# Altium PCB minibot_v1.PcbDoc (part 2 of 2)
Units mm, origin at the board's own origin, x right, y up, seen from the top; angles counter-clockwise.
Board outline 80 x 98 mm, 6 copper layers (Top Layer, GND, PWR, SIG2, GND2, Bottom Layer), stack 1.583 mm thick; 97 components, 104 nets, 461 pads, 159 vias.
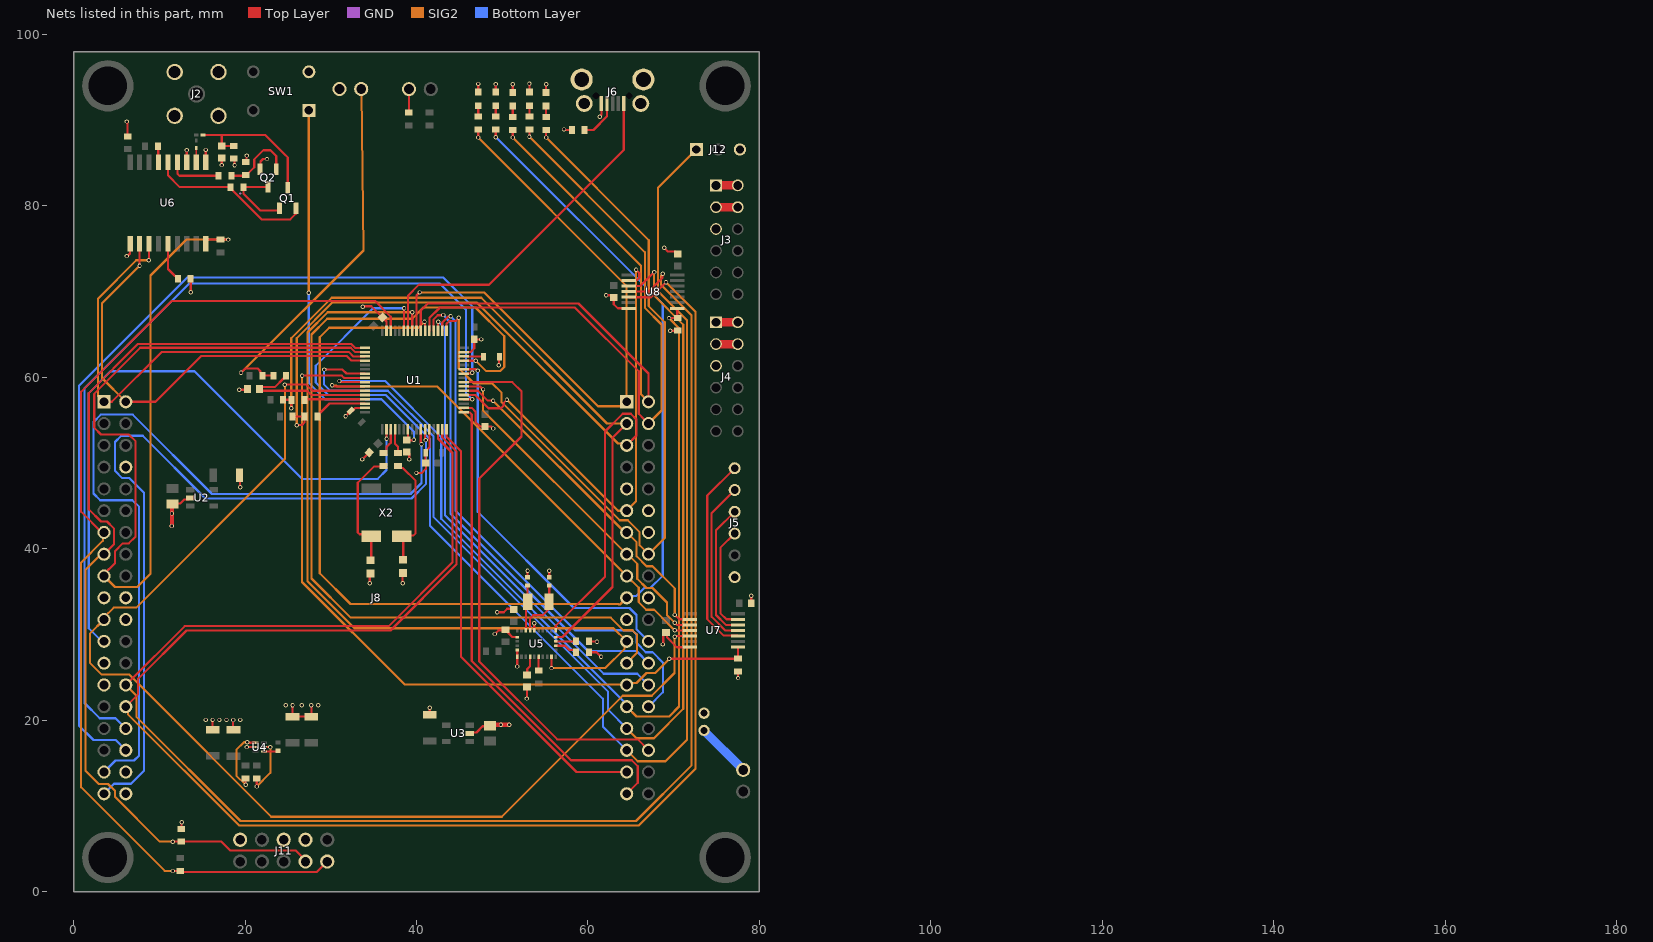
[diagram p6: the nets of this part, all layers, seen from the top]

## Via types
v1: diameter 0.5, hole 0.3, Top Layer to Bottom Layer, 159 vias

## Nets (pads, with @x,y where several pads share a name; then routed paths per layer and width w, separated by ;. In a path a pad name is that pad's centre, name@x,y a point inside that pad or via, vN(x,y) a via of type N, cw(c..) or ccw(c..) an arc to the next point about the centre after c; other vN are vias at no path point) (continued)
GND: C1.1 C2.1 C3.1 C4.1 C5.1 C6.1 C7.2 C8.2 C9.1 C10.1 C11.1 C13.1 C14.1 C15.1 C16.1 C17.1 C18.1 C19.1 C20.1 C21.1 C22.1 C23.1 C24.1 C25.1 C26.1 C27.1 C28.1 C29.1 C30.2 C31.2 D1.1 D2.1 D3.1 D4.1 D5.1 J1.2 J2.2 J2.3 J2.4 J2.5 J3.05 J4.05 J5.1 J6.5 J6.MH1 J6.MH2 J6.MH3 J6.MH4 J7.2 J8.CN7_8 J8.CN7_19 J8.CN7_20 J8.CN7_22 J8.CN10_9 J8.CN10_20 J10.2 J11.2 J11.6 J11.8 J12.A3 Q2.2 R7.1 R9.1 R10.1 R12.1 R13.1 R15.1 R23.1 R27.1 R34.2 R37.1 R38.1 SW1.3 U1.12 U1.18 U1.31 U1.47 U1.63 U2.2 U3.2 U4.2 U5.2 U5.5 U5.6 U5.25 U6.1 U6.10 U6.12 U7.7 U8.7 | length 94.3
  Top Layer w0.254: v1(6.202,74.148) 6.249,74.195 6.345,74.195 6.593,74.443 6.593,75.584 U6.1@6.613,75.604 ; v1(6.213,89.828) 6.213,89.761 6.313,89.661 R27.1@6.313,88.108 ; C1.1@11.475,45.176 C1.1@11.525,45.226 11.588,45.289 12.455,45.289 12.935,45.769 13.435,45.769 U2.2@13.601,45.935 ; R38.1@12.548,7.354 12.611,7.417 v1(12.611,8.115) ; U6.12@13.213,85.104 v1(13.213,86.505) ; v1(13.663,69.925) R23.1@13.663,71.501 ; U6.10@15.413,85.104 v1(15.413,86.528) ; v1(16.217,20.048) 16.225,20.04 C18.1@16.225,18.908 ; v1(17.284,84.761) 17.284,85.525 C13.1@17.334,85.575 ; v1(18.614,20.038) 18.614,18.921 C5.1@18.65,18.885 ; R10.1@18.675,85.483 18.784,85.374 v1(18.784,84.743) ; v1(19.325,58.55) 20.21,58.55 C28.1@20.289,58.629 ; C2.1@19.362,48.578 19.431,48.509 v1(19.431,47.185) ; R9.1@20.086,85.111 20.186,85.211 v1(20.186,85.863) ; v1(20.195,16.88) U4.2@21.211,16.88 ; Q2.2@21.743,84.277 21.801,84.336 21.801,85.17 22.093,85.461 v1(22.561,85.461) ; C6.1@25.55,20.453 C19.1@27.35,20.453 ; C6.1@25.55,20.578 v1(25.55,21.757) ; C19.1@27.738,20.436 v1(27.738,21.757) ; v1(31.73,55.471) 31.73,55.487 32.312,56.069 C22.1@32.312,56.086 32.528,56.086 32.882,56.44 U1.63@33.404,56.44 ; v1(33.675,50.425) C26.1@34.488,51.238 ; v1(33.725,68.25) 33.772,68.297 34.72,68.297 C23.1@36.017,67.001 36.501,66.517 36.501,66.037 ; v1(34.55,35.975) 34.55,37.037 C30.2@34.644,37.131 ; v1(38.381,35.975) 38.381,37.111 C31.2@38.45,37.18 ; C29.1@39.001,51.275 39.153,51.122 v1(39.153,50.425) ; 39.125,91.225 J10.2@39.125,93.613 ; v1(39.987,48.85) 40.618,48.85 41.093,49.325 C21.1@41.093,50.025 ; C21.1@41.053,50.025 41.053,51.294 41.099,51.34 41.099,51.406 41.501,51.808 U1.12@41.501,53.94 ; v1(41.55,21.482) 41.55,20.663 C4.1@41.561,20.652 ; U1.18@45.501,56.44 U1.18@45.534,56.407 ; 46.098,56.44 46.443,56.44 46.863,56.02 46.863,54.826 47.421,54.268 48.005,54.268 C25.1@48.006,54.267 48.698,54.267 48.932,54.033 v1(48.96,54.033) ; 46.098,62.94 46.289,62.94 46.736,63.387 C24.1@46.736,64.427 v1(47.55,64.427) ; U3.2@46.216,18.474 46.327,18.585 46.988,18.585 47.706,19.303 48.473,19.303 C3.1@48.646,19.475 ; D1.1@47.2,93.275 v1(47.2,94.222) ; v1(49.141,30.071) 49.161,30.071 49.597,30.507 49.924,30.507 ; D2.1@49.25,93.275 v1(49.25,94.203) ; v1(49.4,32.6) 50.167,32.6 50.569,33.003 C10.1@51.512,33.003 ; v1(49.579,61.41) 49.626,61.457 49.626,62.407 C27.1@49.579,62.454 ; C9.1@50.552,30.352 50.554,30.354 51.202,29.706 U5.2@51.761,29.706 ; D3.1@51.225,93.203 D3.1@51.225,93.228 v1(51.225,94.188) ; v1(51.746,26.277) U5.6@51.746,27.419 U5.5@51.746,28.206 ; v1(52.86,22.537) 52.899,22.575 C11.1@52.899,23.892 ; C7.2@52.95,36.681 v1(52.95,37.45) ; D4.1@53.17,93.278 v1(53.17,94.263) ; v1(53.725,31.325) 53.736,31.314 53.736,30.503 U5.25@53.746,30.493 ; D5.1@55.116,93.203 D5.1@55.116,93.228 v1(55.116,94.188) ; C8.2@55.475,36.678 v1(55.475,37.45) ; v1(57.204,88.912) 57.257,88.859 R37.1@58.12,88.859 ; R7.1@60.09,29.21 60.125,29.175 v1(61.05,29.175) ; R13.1@60.102,27.94 60.985,27.94 v1(61.525,27.4) ; v1(61.365,90.38) 61.365,90.447 61.565,90.647 61.565,91.19 J6.5@61.575,91.2 ; v1(62.112,69.575) 62.743,69.575 C16.1@63.014,69.304 63.014,68.526 63.486,68.054 U8.7@64.767,68.054 ; v1(68.733,28.854) 68.772,28.893 68.772,30.09 68.935,30.252 69.208,29.979 69.208,29.689 70.367,28.53 U7.7@71.857,28.53 ; v1(68.9,75.1) 69.34,74.66 70.183,74.66 C15.1@70.456,74.387 ; v1(69.592,65.444) R15.1@70.456,65.444 ; R12.1@77.495,25.7 77.5,25.695 v1(77.5,24.925) ; C17.1@79.034,33.655 v1(79.034,34.525)
  Top Layer w0.5: v1(11.47,42.661) 11.475,42.666 v1(11.475,44.125) C1.1@11.475,45.176 ; C3.1@48.646,19.475 v1(49.847,19.475) v1(50.825,19.475)
  GND w0.254: 19.44,81.449 19.456,81.432
  other v1: 15.417,20.046 17.017,20.046 17.842,20.046 19.45,20.046 24.742,21.765 26.604,21.772 28.531,21.772
I2C1_SCL_IMU: J8.CN10_3 R17.1 R18.2 U5.19 | length 86
  Top Layer w0.254: R17.1@24.45,57.397 25.496,57.397 25.421,57.322 25.421,56.422 v1(25.394,56.395) ; 56.447,29.718 57.023,29.718 62.865,35.56 62.865,52.959 J8.CN10_3@64.516,54.61
  SIG2 w0.254: v1(25.394,56.395) 25.394,64.562 30.107,69.275 47.55,69.275 62.215,54.61 J8.CN10_3@64.516,54.61
I2C1_SDA_IMU: J8.CN10_5 R16.1 R19.2 U5.20 | length 94.3
  Top Layer w0.254: R16.1@25.553,55.441 R19.2@26.953,55.441 26.953,54.758 26.642,54.447 26.072,54.447 v1(26.025,54.4) ; U5.20@56.246,30.493 56.246,31.021 61.976,36.751 61.976,53.691 64.041,55.756 64.991,55.756 65.662,55.085 65.662,53.216 J8.CN10_5@64.516,52.07
  SIG2 w0.254: v1(26.025,54.4) 26.025,64.575 30.186,68.736 47.039,68.736 63.5,52.275 64.311,52.275 J8.CN10_5@64.516,52.07
ID: J6.4 R37.2 | length 4.7
  Top Layer w0.254: R37.2@59.62,88.859 60.632,88.859 62.215,90.442 J6.4@62.215,91.938
INT_IMU: J8.CN10_23 U1.41 U5.14 | length 96.2
  Top Layer w0.254: U1.41@39.501,65.44 v1(39.501,67.593) ; v1(55.746,26.092) U5.14@55.746,27.419
  SIG2 w0.254: v1(39.501,67.593) 29.643,67.593 27.287,65.237 27.287,36.213 32.76,30.74 62.986,30.74 J8.CN10_23@64.516,29.21 64.272,28.966 64.272,28.348 62.016,26.092 v1(55.746,26.092)
LED_1: J8.CN10_1 R28.1 U1.40 | length 73.4
  Top Layer w0.254: U1.40@40.001,65.44 40.001,69.55 v1(40.357,69.906) ; R28.1@47.125,88.878 47.2,88.803 v1(47.2,87.975)
  SIG2 w0.254: v1(40.357,69.906) 47.887,69.906 61.16,56.633 63.999,56.633 J8.CN10_1@64.516,57.15 64.475,57.191 64.475,70.7 v1(47.2,87.975)
LED_2: J8.CN10_19 R29.1 U1.38 | length 144.6
  Top Layer w0.254: v1(40.929,66.5) 40.976,66.453 40.976,65.465 U1.38@41.001,65.44 ; v1(49.25,88) R29.1@49.25,88.931
  SIG2 w0.254: v1(40.929,66.5) 40.208,65.78 29.828,65.78 28.725,64.676 28.725,37.15 32.306,33.569 63.437,33.569 63.509,33.569 63.583,33.515 63.741,33.515 J8.CN10_19@64.516,34.29
  Bottom Layer w0.254: v1@49.266,88.016 68.71,68.572 68.71,36.863 67.291,35.445 66.59,35.445 65.662,34.517 64.743,34.517 J8.CN10_19@64.516,34.29
LED_3: J8.CN10_2 R30.1 U1.39 | length 74.2
  Top Layer w0.254: U1.39@40.501,65.44 40.501,67.802 41.317,68.618 58.89,68.618 67.056,60.452 J8.CN10_2@67.056,57.15 ; v1(51.225,87.975) R30.1@51.225,88.859
  SIG2 w0.254: v1(51.225,87.975) 66.179,73.021 66.179,58.027 J8.CN10_2@67.056,57.15
LED_4: J8.CN10_4 R31.1 U1.37 | length 76.6
  Top Layer w0.254: U1.37@41.501,65.44 41.501,66.919 42.732,68.15 58.472,68.15 65.91,60.712 65.91,55.756 J8.CN10_4@66.515,55.151 ; v1(53.17,88.052) R31.1@53.17,88.934
  SIG2 w0.254: v1(53.17,88.052) 66.633,74.588 66.633,68.115 68.577,66.171 68.577,56.131 J8.CN10_4@67.056,54.61
LED_5: J8.CN10_16 R32.1 U1.33 | length 97.1
  Top Layer w0.254: U1.33@43.501,65.44 43.501,66.252 43.81,66.561 44.55,66.561 v1(44.934,66.946) ; v1(55.116,87.975) R32.1@55.116,88.859
  SIG2 w0.254: v1(44.934,66.946) 44.934,61.056 46.702,59.288 48.841,59.288 49.925,58.204 49.925,57.1 63.7,43.325 64.63,43.325 66.025,41.93 66.025,40.401 J8.CN10_16@67.056,39.37 68.961,41.275 68.961,66.429 67.087,68.303 67.087,76.004 v1(55.116,87.975)
MOT_1A_3V3: J8.CN10_13 U1.22 U7.2 | length 39.6
  Top Layer w0.254: 46.098,58.44 47.152,58.44 48.305,57.288 v1(48.932,57.288) ; v1(70.116,32.291) 70.627,31.78 U7.2@71.857,31.78
  SIG2 w0.254: v1(48.932,57.288) 64.31,41.91 J8.CN10_13@64.516,41.91 65.67,40.756 65.67,39.135 66.829,37.976 67.531,37.976 70.116,35.391 v1(70.116,32.291)
MOT_1B_3V3: J8.CN10_15 U1.23 U7.3 | length 40.6
  Top Layer w0.254: 46.098,58.94 47.401,58.94 47.748,58.592 v1(47.766,58.592) ; v1(70.116,31.374) 70.122,31.374 70.366,31.13 U7.3@71.857,31.13
  SIG2 w0.254: v1(47.766,58.592) 47.766,56.12 J8.CN10_15@64.516,39.37 64.63,39.37 65.75,38.25 65.75,36.515 66.829,35.436 67.531,35.436 69.222,33.744 69.222,32.253 70.102,31.374 v1(70.116,31.374)
MOT_2A_3V3: J8.CN10_17 U1.58 U7.4 | length 58.4
  Top Layer w0.254: v1(30.15,59.071) 30.217,59.071 30.348,58.94 U1.58@34.001,58.94 ; v1(70.107,30.505) 70.12,30.492 71.844,30.492 U7.4@71.857,30.48
  SIG2 w0.254: v1(30.15,59.071) 30.197,59.024 30.668,59.024 30.752,58.94 42.406,58.94 J8.CN10_17@64.516,36.83 ; J8.CN10_17@64.532,36.83 65.91,35.452 65.914,35.352 65.914,35.332 65.91,35.255 65.91,33.782 66.796,32.896 67.716,32.896 69.485,31.127 69.485,31.113 70.093,30.505 v1(70.107,30.505)
MOT_2B_3V3: J8.CN7_21 U1.59 U7.5 | length 141.6
  Top Layer w0.254: v1(24.65,59.15) 27.151,59.15 27.861,58.44 U1.59@34.001,58.44 ; v1(70.107,29.751) 70.174,29.751 70.253,29.83 U7.5@71.857,29.83
  SIG2 w0.254: v1(24.65,59.15) 24.65,50.471 7.323,33.144 5.621,33.144 5.618,33.147 4.699,33.147 3.556,32.004 J8.CN7_21@3.556,31.75 1.905,30.099 1.905,26.7 3.279,25.326 6.52,25.326 9.094,22.753 9.094,22.739 23.07,8.763 49.943,8.763 64.04,22.86 67.437,22.86 70.093,25.516 70.093,29.737 v1(70.107,29.751)
MOTOR_1_N: J3.03 J3.04 | length 2.5
  Top Layer w1: J3.03@74.78,79.846 J3.04@77.32,79.846
MOTOR_1_P: J3.01 J3.02 | length 2.5
  Top Layer w1: J3.01@74.78,82.386 J3.02@77.32,82.386
MOTOR_2_N: J4.03 J4.04 | length 2.5
  Top Layer w1: J4.03@74.93,63.881 J4.04@77.47,63.881
MOTOR_2_P: J4.01 J4.02 | length 2.5
  Top Layer w1: J4.01@74.93,66.421 J4.02@77.47,66.421
MOTOR_IN1: J5.3 U7.13 | length 11.5
  Top Layer w0.254: U7.13@76.657,31.78 76.149,31.78 75.438,32.491 75.438,40.119 J5.3@77.102,41.783
MOTOR_IN2: J5.4 U7.12 | length 16
  Top Layer w0.254: J5.4@77.102,44.323 74.93,42.151 74.93,32.28 76.08,31.13 U7.12@77.495,31.13
MOTOR_IN3: J5.5 U7.11 | length 19.6
  Top Layer w0.254: J5.5@77.102,46.863 74.422,44.183 74.422,32.07 76.012,30.48 U7.11@77.495,30.48
MOTOR_IN4: J5.6 U7.10 | length 23.3
  Top Layer w0.254: J5.6@77.102,49.403 73.914,46.215 73.914,31.801 75.834,29.881 77.445,29.881 U7.10@77.495,29.83
NetC7_1: C7.1 U5.27 Y1.2 | length 4.4
  Top Layer w0.254: U5.27@52.754,30.493 Y1.2@52.754,32.96 ; Y1.2@52.95,33.825 C7.1@52.95,35.727
NetC8_1: C8.1 U5.26 Y1.1 | length 6.6
  Top Layer w0.254: U5.26@53.246,30.493 53.246,31.877 53.618,32.249 54.718,32.249 55.649,33.18 Y1.1@55.649,33.58 ; Y1.1@55.45,33.825 55.475,33.85 C8.1@55.475,35.725
NetC11_2: C11.2 U5.9 | length 2.8
  Top Layer w0.254: C11.2@52.899,25.292 52.899,25.046 52.917,25.064 52.917,25.982 53.246,26.312 U5.9@53.246,27.419
NetC12_2: C12.2 U6.11 | length 1.5
  Top Layer w0.147: U6.11@14.313,85.302 C12.2@14.313,86.739 C12.2@14.313,86.803
NetC13_2: C13.2 L2.2 Q1.3 R10.2 | length 17
  Top Layer w0.254: L2.2@15.3,88.25 17.284,88.25 ; R10.2@18.675,87 17.309,87 C13.2@17.284,86.975 17.284,88.25 ; Q1.3@24.981,82.107 24.981,85.658 24.702,85.938 22.389,88.25 17.284,88.25
NetC27_2: C27.2 U1.30 | length 2.1
  Top Layer w0.254: U1.30@45.501,62.44 45.509,62.432 C27.2@47.55,62.432
NetC28_2: C28.2 R20.2 U1.60 | length 15.8
  Top Layer w0.254: R20.2@24.803,60.198 24.803,60.098 24.58,59.875 24.48,59.875 23.466,58.862 21.922,58.862 C28.2@21.689,58.629 21.879,58.44 27.219,58.44 27.727,57.932 U1.60@33.404,57.932
NetC30_1: C30.1 R26.2 X2.4 | length 14.2
  Top Layer w0.254: C30.1@34.726,38.939 X2.4@34.726,41.446 34.478,41.694 33.363,41.694 33.147,41.91 33.147,47.709 35.028,49.59 R26.2@36.501,49.59
NetC31_1: C31.1 R25.2 X2.1 | length 13.6
  Top Layer w0.254: R25.2@37.653,49.59 37.791,49.452 38.26,49.452 38.283,49.428 38.414,49.428 39.9,47.943 39.9,41.805 39.639,41.544 38.374,41.544 X2.1@38.276,41.446 38.45,41.272 C31.1@38.45,38.72
NetD1_2: D1.2 R28.2 | length 1.2
  Top Layer w0.254: D1.2@47.2,91.675 R28.2@47.202,90.431 R28.2@47.202,90.431
NetD2_2: D2.2 R29.2 | length 1.2
  Top Layer w0.254: R29.2@49.25,90.431 D2.2@49.25,91.675
NetD3_2: D3.2 R30.2 | length 1.2
  Top Layer w0.254: R30.2@51.225,90.359 D3.2@51.225,91.603
NetD4_2: D4.2 R31.2 | length 1.2
  Top Layer w0.254: R31.2@53.17,90.434 D4.2@53.17,91.678
NetD5_2: D5.2 R32.2 | length 1.2
  Top Layer w0.254: R32.2@55.116,90.359 D5.2@55.116,91.603
NetJ1_1: J1.1 J9.2 | length 6.6
  Top Layer w0.254: J9.2@77.978,14.351 J9.2@78.105,14.224
  Bottom Layer w1: J1.1@73.533,18.796 J9.2@78.105,14.224
NetJ7_1: J7.1 R20.1 R21.1 | length 43.2
  Top Layer w0.254: v1(19.534,60.521) 19.534,60.532 20.032,61.029 21.047,61.029 21.05,61.027 21.476,61.027 21.816,60.686 21.816,60.521 21.944,60.393 R21.1@22.109,60.393 ; R21.1@22.028,60.198 R20.1@23.303,60.198
  SIG2 w0.254: v1(19.534,60.521) 33.809,74.795 33.809,74.876 J7.1@33.575,93.35
NetL1_1: L1.1 U4.4 | length 1.7
  Top Layer w0.254: U4.4@22.202,16.38 L1.1@23.9,16.38
NetQ1_1: Q1.1 Q2.3 R11.1 | length 8.7
  Top Layer w0.254: Q2.3@22.695,82.245 22.633,82.183 R11.1@19.831,82.183 19.831,81.395 21.761,79.465 Q1.1@24.029,79.465
NetQ1_2: Q1.2 R11.2 U6.14 | length 18.8
  Top Layer w0.254: U6.14@11.013,85.104 11.013,83.559 12.389,82.183 R11.2@18.274,82.183 ; R11.2@18.274,82.083 21.933,78.424 25.273,78.424 Q1.2@25.934,79.084
NetQ2_1: Q2.1 R8.1 R9.2 | length 8.5
  Top Layer w0.254: R8.1@18.384,83.522 R9.2@19.805,83.522 ; R9.2@20.086,83.611 20.186,83.611 21.082,84.507 21.082,85.419 22.14,86.477 22.982,86.477 23.648,85.812 Q2.1@23.648,84.277
NetR4_1: R4.1 U5.11 | length 1.6
  Top Layer w0.254: R4.1@54.246,25.814 U5.11@54.246,27.419
NetR7_2: R7.2 U5.18 | length 2.4
  Top Layer w0.254: U5.18@56.232,29.21 R7.2@58.59,29.21
NetR8_2: R8.2 U6.13 | length 6.4
  Top Layer w0.254: 12.113,83.748 U6.13@12.113,85.104 ; 12.12,83.748 12.346,83.522 R8.2@17.08,83.522
NetR18_1: R18.1 U1.61 | length 7
  Top Layer w0.254: R18.1@27.022,57.371 27.09,57.44 U1.61@34.001,57.44
NetR19_1: R19.1 U1.62 | length 6.2
  Top Layer w0.254: R19.1@28.453,55.441 28.453,55.541 29.86,56.948 33.531,56.948 33.539,56.94 U1.62@34.001,56.94
NetR23_2: R23.2 U6.5 | length 4.6
  Top Layer w0.254: U6.5@11.013,75.604 11.013,72.64 11.829,71.824 11.94,71.824 12.163,71.601 R23.2@12.163,71.501
NetR24_2: R24.2 U6.15 | length 1.9
  Top Layer w0.254: R24.2@9.863,86.955 9.888,86.93 9.888,85.129 U6.15@9.913,85.104
NetR25_1: R25.1 U1.4 | length 2.8
  Top Layer w0.254: U1.4@37.501,53.806 37.501,52.244 37.849,51.896 R25.1@37.849,51.175
NetR26_1: R26.1 U1.3 | length 3.1
  Top Layer w0.254: R26.1@36.501,51.09 36.501,51.876 36.822,52.197 36.822,52.199 37.001,52.378 U1.3@37.001,53.94
NRST: C29.2 SW1.1 U1.7 | length 48.7
  Top Layer w0.254: U1.7@39.001,53.343 39.001,52.675 39.575,52.675 39.634,52.734 v1(39.701,52.734)
  SIG2 w0.254: v1(27.425,69.875) 27.44,69.89 27.44,91.116 SW1.1@27.455,91.131
  Bottom Layer w0.254: v1(27.425,69.875) 27.425,59.375 29.36,57.44 35.923,57.44 39.701,53.663 v1(39.701,52.734)
OE_ENC: J8.CN10_29 R15.2 U1.57 U8.8 | length 113.1
  Top Layer w0.254: v1(31.013,59.571) 31.08,59.571 31.211,59.44 U1.57@34.001,59.44 ; v1(69.452,66.912) 69.468,66.928 70.44,66.928 R15.2@70.456,66.944 70.405,66.995 U8.8@70.405,68.054
  SIG2 w0.254: J8.CN10_29@64.516,21.59 65.662,20.444 69.463,20.444 70.625,21.606 70.625,65.739 v1(69.452,66.912)
  Bottom Layer w0.254: v1(31.013,59.571) 36.342,59.571 42.881,53.032 42.881,43.494 J8.CN10_29@64.478,21.897 ; J8.CN10_29@64.516,21.59 J8.CN10_29@64.516,21.935
OE_MOT: J8.CN10_27 R12.2 U1.56 U7.8 | length 90
  Top Layer w0.254: v1(26.656,60.202) 31.274,60.202 31.536,59.94 U1.56@34.001,59.94 ; v1(69.462,27.178) R12.2@77.495,27.178 ; R12.2@77.495,27.2 U7.8@77.495,28.53
  SIG2 w0.254: v1(26.656,60.202) 26.656,36.125 38.592,24.189 64.457,24.189 J8.CN10_27@64.516,24.13 64.743,24.357 65.662,24.357 66.829,25.524 67.841,25.524 69.462,27.145 v1(69.462,27.178)
PA2: J8.CN10_35 U1.16 | length 52.1
  Top Layer w0.254: U1.16@43.501,53.94 43.504,53.937 43.504,53.089 45.175,51.418 45.175,27.45 58.655,13.97 J8.CN10_35@64.516,13.97
PA3: J8.CN10_37 U1.17 | length 58
  Top Layer w0.254: U1.17@45.501,55.94 45.526,55.915 46.196,55.915 46.443,55.668 46.443,26.919 58.012,15.35 65.1,15.35 65.8,14.65 65.8,12.714 J8.CN10_37@64.516,11.43
PA4: J8.CN7_32 U1.20 | length 105.3
  Top Layer w0.254: U1.20@45.501,57.44 46.471,57.44 46.492,57.46 v1(46.5,57.46)
  Bottom Layer w0.254: J8.CN7_32@6.096,19.05 4.896,20.25 3.05,20.25 1.275,22.025 1.275,58.725 13.5,70.95 42.72,70.95 45.775,67.895 45.775,58.157 v1@46.481,57.45
PA9: J8.CN10_21
PA11: J8.CN10_14
PA12: J8.CN10_12
PB0: J8.CN7_34 U1.26 | length 107.6
  Top Layer w0.254: U1.26@45.501,60.44 46.348,60.44 46.433,60.525 v1(46.5,60.525)
  Bottom Layer w0.254: J8.CN7_34@6.096,16.51 4.908,17.698 2.326,17.698 0.625,19.399 0.625,59 13.275,71.65 43.131,71.65 46.5,68.281 v1(46.5,60.525)
PB1: J8.CN10_24 U1.27 | length 45.3
  Top Layer w0.254: U1.27@45.501,60.94 46.923,60.94 47.076,60.788 v1(47.142,60.788)
  Bottom Layer w0.254: v1(47.142,60.788) 47.142,44.333 58.369,33.106 64.836,33.106 65.651,32.291 65.651,31.22 65.662,31.209 65.662,30.604 J8.CN10_24@67.056,29.21
PB8: J8.CN7_38
PB9: J8.CN7_36
PB10: J8.CN10_25 U1.29 | length 107.1
  Top Layer w0.254: U1.29@45.501,61.94 v1(46.923,61.94)
  SIG2 w0.254: v1(46.923,61.94) 48.138,60.725 49.732,60.725 50.225,61.218 50.225,64.799 46.874,68.15 40.806,68.15 39.501,66.845 29.595,66.845 27.75,65 27.75,36.55 32.325,31.975 62.658,31.975 64.128,30.505 65.177,30.505 65.7,29.982 65.7,27.854 J8.CN10_25@64.516,26.67
PB13: J8.CN10_30 U1.34 | length 63.1
  Top Layer w0.254: U1.34@43.001,65.44 43.001,66.403 43.683,67.085 43.935,67.085 v1(43.975,67.125)
  Bottom Layer w0.254: v1(43.975,67.125) 44.55,66.55 44.55,44.45 58.495,30.505 65.177,30.505 65.651,30.031 65.651,29.032 66.743,27.94 67.535,27.94 68.733,26.742 68.733,23.267 J8.CN10_30@67.056,21.59
PB14: J8.CN10_28 U1.35 | length 56.1
  Top Layer w0.254: U1.35@42.501,65.44 42.513,65.452 42.513,66.488 v1(42.525,66.5)
  Bottom Layer w0.254: v1(42.525,66.5) 43.325,65.7 43.325,43.925 61.825,25.425 65.761,25.425 J8.CN10_28@67.178,24.008
PB15: J8.CN10_26 U1.36 | length 56.5
  Top Layer w0.254: U1.36@42.001,65.44 42.001,66.765 42.474,67.238 43.072,67.238 v1(43.105,67.271)
  Bottom Layer w0.254: v1@43.105,67.271 43.975,66.401 43.975,44.1 60,28.075 65.651,28.075 J8.CN10_26@67.056,26.67
PC2: J8.CN7_35 U1.10 | length 97.5
  Top Layer w0.254: U1.10@40.501,53.94 40.501,52.337 40.581,52.257 v1(40.581,52.19)
  Bottom Layer w0.254: J8.CN7_35@3.556,13.97 4.894,15.308 7.057,15.308 7.65,15.901 7.65,44.891 6.866,45.675 3.1,45.675 2.326,46.449 2.326,54.801 3.176,55.651 6.899,55.651 16.156,46.394 39.295,46.394 40.581,47.68 v1(40.581,52.19)
PC3: J8.CN7_37 U1.11 | length 92.7
  Top Layer w0.254: U1.11@41.001,53.94 41.001,52.78 v1(41.093,52.688)
  Bottom Layer w0.254: J8.CN7_37@3.556,11.43 4.726,12.6 6.7,12.6 8.2,14.1 8.2,46.575 6.525,48.25 5.7,48.25 4.826,49.124 4.826,52.451 5.569,53.194 8.081,53.194 15.4,45.875 39.425,45.875 41.093,47.543 v1(41.093,52.688)
PC4: J8.CN10_34 U1.24 | length 64.7
  Top Layer w0.254: U1.24@45.501,59.44 51.16,59.44 52.235,58.365 52.235,53.11 47.325,48.2 47.325,26.869 56.419,17.775 65.791,17.775 J8.CN10_34@67.056,16.51
PC13: J8.CN7_23 U1.2 | length 76
  Top Layer w0.254: U1.2@36.501,53.94 36.501,52.835 v1(36.506,52.83)
  Bottom Layer w0.254: J8.CN7_23@3.556,29.21 3.305,29.21 1.778,30.737 1.778,58.159 4.321,60.702 14.117,60.702 26.656,48.163 35.475,48.163 36.506,49.195 v1(36.506,52.83)
PC14: J8.CN7_25
PC15: J8.CN7_27
PG: R2.2 U4.1 | length 7.9
  Top Layer w0.254: R2.2@20.05,13.225 20.075,13.2 v1(20.075,12.473) ; v1(20.248,17.442) 20.31,17.38 U4.1@21.211,17.38
  SIG2 w0.254: v1(20.075,12.473) 18.995,13.553 18.995,16.56 19.877,17.442 v1(20.248,17.442)
RESET_N_GPS: J8.CN7_17 R22.1 U1.50 U6.9 | length 116
  Top Layer w0.254: J8.CN7_17@3.556,36.83 3.556,37.056 4.836,38.336 4.836,39.731 5.745,40.64 6.447,40.64 7.242,41.435 7.242,52.545 6.447,53.34 3.205,53.34 2.41,54.135 2.41,58.073 7.786,63.448 32.349,63.448 32.857,62.94 U1.50@33.404,62.94 ; U6.9@15.413,75.604 15.413,75.9 15.586,76.073 17.133,76.073 R22.1@17.145,76.061 17.149,76.065 18.046,76.065 v1(18.05,76.07)
  SIG2 w0.254: J8.CN7_17@3.783,37.057 J8.CN7_17@3.556,36.83 4.836,35.55 7.425,35.55 8.975,37.1 8.975,71.879 13.166,76.07 v1(18.05,76.07)
S_ADDR_IMU: R13.2 U5.17 | length 2.7
  Top Layer w0.254: U5.17@56.232,28.702 57.32,28.702 57.828,28.194 58.379,28.194 58.602,27.971 R13.2@58.602,27.94
SERVO_PWM: J8.CN10_33 J12.A1 U1.43 | length 160.2
  Top Layer w0.254: U1.43@38.501,65.44 38.526,65.464 38.526,68.026 v1(38.55,68.05)
  SIG2 w0.254: J8.CN10_33@64.516,16.51 65.801,15.225 69.05,15.225 71.55,17.725 71.55,66.675 68.175,70.05 68.175,82.115 J12.A1@72.635,86.575
  Bottom Layer w0.254: v1(38.55,68.05) 34.93,68.05 28.24,61.36 28.24,59.41 29.718,57.932 36.429,57.932 41.575,52.786 41.575,42.676 61.736,22.515 61.736,19.29 J8.CN10_33@64.516,16.51
SW_REG_EN: R1.1 U4.5 | length 7
  Top Layer w0.254: v1(21.371,12.281) 21.371,13.221 R1.1@21.375,13.225 ; U4.5@22.202,16.88 v1(22.96,16.88)
  SIG2 w0.254: v1(21.371,12.281) 22.96,13.869 v1(22.96,16.88)
SWCLK: J8.CN7_15 J11.7 R38.2 U1.49 | length 112
  Top Layer w0.254: J8.CN7_15@3.556,39.37 4.702,40.516 4.702,42.385 3.907,43.18 3.205,43.18 1.778,44.607 1.778,58.159 7.521,63.902 32.354,63.902 32.816,63.44 U1.49@33.404,63.44 ; v1(11.557,5.854) R38.2@12.548,5.854 17.26,5.854 18.288,4.826 25.908,4.826 27.051,3.683 J11.7@27.051,3.53
  SIG2 w0.254: J8.CN7_15@3.556,39.37 3.211,39.37 1.397,37.556 1.397,14.134 2.955,12.576 4.031,12.576 4.826,11.781 4.826,11.079 10.051,5.854 v1(11.557,5.854)
SWDIO: J8.CN7_13 J11.9 R35.1 U1.46 | length 123.9
  Top Layer w0.254: J8.CN7_13@3.556,41.91 3.302,41.91 0.889,44.323 0.889,58.339 11.458,68.908 35.173,68.908 37.001,67.081 37.001,66.037 ; v1(11.557,2.425) 12.23,2.425 R35.1@12.257,2.399 ; R35.1@12.448,2.425 12.549,2.324 28.385,2.324 J11.9@29.591,3.53
  SIG2 w0.254: J8.CN7_13@3.556,41.91 3.419,41.773 3.419,40.934 0.889,38.404 0.889,12.195 10.645,2.439 11.543,2.439 v1(11.557,2.425)
TIM2_CH1_ENC_1A: J8.CN10_11 U1.21 U8.2 | length 56
  Top Layer w0.254: 46.098,57.94 46.863,57.94 48.403,56.4 49.85,56.4 50.176,56.726 50.176,57.026 v1(50.55,57.4) ; U8.2@64.767,71.304 64.817,71.355 65.748,71.355 65.986,71.592 65.986,72.176 v1(65.605,72.557)
  SIG2 w0.254: v1(50.55,57.4) 63.5,44.45 J8.CN10_11@64.516,44.45 65.605,45.539 v1(65.605,72.557)
TIM2_CH2_ENC_1B: J8.CN10_31 U1.55 U8.3 | length 129.9
  Top Layer w0.254: v1(29.225,60.906) 29.244,60.925 31.357,60.925 31.842,60.44 U1.55@34.001,60.44 ; U8.3@64.767,70.654 66.088,70.654 67.714,72.28 v1(67.718,72.28)
  SIG2 w0.254: J8.CN10_31@64.516,19.05 65.662,17.904 67.688,17.904 71.12,21.336 71.12,66.136 67.714,69.542 67.714,72.276 v1(67.718,72.28)
  Bottom Layer w0.254: v1@29.225,60.973 29.225,59.15 29.935,58.44 36.656,58.44 42,53.096 42,43.7 62.35,23.35 62.35,21.216 J8.CN10_31@64.516,19.05
TIM5_CH1_ENC_2A: J8.CN7_28 U1.14 U8.4 | length 200.9
  Top Layer w0.254: J8.CN7_28@6.096,24.13 12.954,30.988 36.747,30.988 44.2,38.441 44.2,51.177 42.501,52.876 U1.14@42.501,53.94 ; U8.4@64.767,70.004 67.104,70.004 68.678,71.578 68.678,72.028 v1(68.725,72.075)
  SIG2 w0.254: J8.CN7_28@6.096,24.13 7.326,22.9 7.326,20.399 19.47,8.255 65.595,8.255 72.056,14.716 72.056,67.28 68.525,70.811 68.525,71.84 68.725,72.04 v1(68.725,72.075)
TIM5_CH2_ENC_2B: J8.CN7_30 U1.15 U8.5 | length 201.5
  Top Layer w0.254: J8.CN7_30@6.096,21.59 7.537,23.031 7.537,24.85 13.167,30.48 36.957,30.48 44.654,38.177 44.654,51.365 43.001,53.018 U1.15@43.001,53.94 ; U8.5@64.767,69.354 64.773,69.348 67.348,69.348 v1(69.1,71.1)
  SIG2 w0.254: J8.CN7_30@6.096,21.59 6.335,21.351 6.335,20.716 19.304,7.747 65.954,7.747 72.525,14.318 72.525,67.675 v1(69.1,71.1)
UART3_RX_GPS: J8.CN7_1 U1.51 U6.3 | length 55.1
  Top Layer w0.254: J8.CN7_1@3.556,57.15 4.475,57.15 10.265,62.94 32.139,62.94 32.639,62.44 U1.51@34.001,62.44 ; v1(8.775,73.65) 8.794,73.669 8.794,75.585 U6.3@8.813,75.604
  SIG2 w0.254: J8.CN7_1@3.556,57.15 2.85,57.856 2.85,69.185 7.315,73.65 v1(8.775,73.65)
UART3_TX_GPS: J8.CN7_2 U1.52 U6.2 | length 51.2
  Top Layer w0.254: J8.CN7_2@6.096,57.15 9.55,57.15 14.886,62.486 31.875,62.486 32.413,61.948 U1.52@33.404,61.948 ; v1(7.7,73) 7.707,73.007 7.707,75.598 U6.2@7.713,75.604
  SIG2 w0.254: J8.CN7_2@6.096,57.15 3.325,59.921 3.325,68.625 v1(7.7,73)
VBUS: J6.1 U1.42 | length 41.7
  Top Layer w0.254: U1.42@39.001,65.44 39.001,69.526 40.275,70.8 48.45,70.8 64.165,86.515 J6.1@64.165,91.938
pads on no net: J3.06 J3.08 J3.10 J3.12 J4.06 J4.08 J4.10 J4.12 J6.MH5 J6.MH6 J8.CN7_5 J8.CN7_7 J8.CN7_9 J8.CN7_10 J8.CN7_11 J8.CN7_12 J8.CN7_14 J8.CN7_16 J8.CN7_18 J8.CN7_24 J8.CN7_26 J8.CN7_29 J8.CN7_31 J8.CN7_33 J8.CN10_7 J8.CN10_8 J8.CN10_10 J8.CN10_18 J8.CN10_32 J8.CN10_36 J8.CN10_38 J11.1 J11.3 J11.4 J11.5 SW1.2 SW1.4 U1.5 U1.6 U1.8 U1.9 U2.4 U3.4 U5.1 U5.7 U5.8 U5.10 U5.12 U5.13 U5.15 U5.16 U5.21 U5.22 U5.23 U5.24 U6.7 U6.16 U6.17 U7.6 U7.9 U8.6 U8.9 X2.2 X2.3

## Polygon pours and split planes (outlines as drawn)
3V3 on PWR "3V3_L03_P007" (solid, pour order 7): 0,0 80.01,0 80.01,97.99 80,98 0,98
3V3_IMU on PWR "3V3_IMU_L03_P004" (solid, pour order 4): 37.279,24.15 44.432,24.214 44.2,40.389 62.45,40.389 62.45,0.914 62.45,0 37.279,0
3V3_GPS on PWR "3V3_GPS_L03_P006" (solid, pour order 6): 0,98 19.558,98 19.558,89.109 26.797,89.121 26.759,77.635 26.797,77.597 19.558,77.597 19.558,68.275 0,68.275
GND on Top Layer "GND_L01_P015" (solid, pour order 15): 12.324,17.64 19.394,17.64 19.394,16.649 21.727,16.649 21.727,18.908 33.75,18.908 33.75,22.875 12.324,22.875
5V on Top Layer "5V_L01_P017" (solid, pour order 17): 12.324,17.659 12.324,11.125 24.029,11.125 24.029,16.025 21.727,16.025 21.727,16.649 19.391,16.674 19.376,17.659
3V3 on Top Layer "3V3_L01_P016" (solid, pour order 16): 33.75,18.908 21.727,18.908 21.727,16.025 21.935,16.025 33.75,16.025
GND on GND "GND_L02_P000" (solid, remove dead copper, pour order 0): 0,0 80.01,0 80.01,97.99 80,98 0,98
GND on GND2 "GND_L05_P002" (solid, pour order 2): 0,0 80.01,0 80.01,97.99 80,98 0,98

## Other copper
Top Layer:
  region: 166.583,51.767 166.583,51.611 166.426,51.611 166.426,51.767
  region: 180.026,47.702 180.183,47.702 180.183,47.546 179.87,47.546 179.87,47.859 180.026,47.859
  region: 166.27,51.923 166.114,51.923 166.114,52.08 166.27,52.08

## Silkscreen, mask and mechanical layers (free items; w line width, h text height)
Top Overlay:
  drawing of 3 lines, arcs and shapes, not listed
  text "Swarm Crawler" at 52.479,3.629 h1.52
  text "MiniBot_V2" at 56.904,0.758 h1.52
Mechanical 1:
  lines w0.254: 0,0 0,97.708 0,98 ; 0.119,0 61.75,0 80,0 ; 0,98 80,98 80.01,97.99 80.01,75.313 80,75.303 80,57.952 80,16.375 80,0 ; 0,98 0,98 ; 80,0 80,0
Top Assembly:
  lines w0.013: 0.007,0.034 0.007,0.034 ; 0.007,0.034 0.007,0.034 ; 0.007,0.034 0.007,0.034 ; 0.007,0.034 0.007,0.034 ; 0.007,0.034 0.007,0.034 ; 0.007,0.034 0.007,0.034 ; 0.007,0.034 0.007,0.034 ; 0.007,0.035 0.007,0.035 ; 0.007,0.035 0.007,0.035 ; 0.007,0.035 0.007,0.035 ; 0.007,0.035 0.007,0.035 ; 0.007,0.035 0.007,0.035 ; 0.007,0.035 0.007,0.035 ; 0.007,0.035 0.007,0.035 ; 0.007,0.035 0.007,0.035 ; 0.007,0.035 0.007,0.035 ; 0.007,0.035 0.007,0.035 ; 0.007,0.035 0.007,0.035 ; 0.006,0.035 0.007,0.035 ; 0.006,0.035 0.006,0.035 ; 0.006,0.035 0.006,0.035 ; 0.006,0.035 0.006,0.035 ; 0.006,0.035 0.006,0.035 ; 0.007,0.035 0.007,0.035 ; 0.007,0.035 0.007,0.035 ; 0.008,0.035 0.008,0.035 ; 0.008,0.035 0.008,0.035 ; 0.008,0.035 0.008,0.035 ; 0.008,0.035 0.008,0.035 ; 0.008,0.035 0.008,0.035 ; 0.008,0.035 0.008,0.035 ; 0.008,0.035 0.008,0.035 ; 0.008,0.035 0.008,0.035 ; 0.008,0.035 0.008,0.035 ; 0.008,0.035 0.008,0.035 ; 0.008,0.035 0.008,0.035 ; 0.008,0.035 0.008,0.035 ; 0.008,0.035 0.008,0.035 ; 0.008,0.035 0.008,0.035 ; 0.007,0.034 0.008,0.035 ; 0.007,0.034 0.007,0.034 ; 0.007,0.034 0.007,0.034 ; 0.007,0.034 0.007,0.034 ; 0.007,0.034 0.007,0.034 ; 0.007,0.034 0.007,0.034 ; 0.007,0.034 0.007,0.034 ; 0.007,0.034 0.007,0.034 ; 0.007,0.034 0.007,0.034 ; 0.007,0.034 0.007,0.034 ; 0.007,0.034 0.007,0.034 ; 0.007,0.034 0.007,0.034 ; 0.007,0.034 0.007,0.034 ; 0.007,0.034 0.007,0.034 ; 0.008,0.035 ccw(c0.005,0.038) 0.008,0.035 ; 0.008,0.035 0.008,0.035 ; 0.008,0.035 0.008,0.035 ; 0.008,0.036 0.008,0.036 ; 0.008,0.036 0.008,0.036 ; 0.008,0.036 0.008,0.036 ; 0.008,0.035 0.008,0.036 ; 0.008,0.035 0.008,0.035 ; 0.008,0.035 0.008,0.035 ; 0.008,0.035 0.008,0.035 ; 0.008,0.035 0.008,0.035 ; 0.008,0.035 0.008,0.035 ; 0.007,0.035 0.008,0.035 ; 0.007,0.035 0.007,0.035 ; 0.007,0.035 0.007,0.035 ; 0.007,0.035 0.007,0.035 ; 0.007,0.035 0.007,0.035 ; 0.007,0.035 0.007,0.035 ; 0.007,0.035 0.007,0.035 ; 0.007,0.035 0.007,0.035 ; 0.007,0.035 0.007,0.035 ; 0.007,0.035 0.007,0.035 ; 0.007,0.035 0.007,0.035 ; 0.007,0.035 0.007,0.035 ; 0.007,0.035 0.007,0.035 ; 0.008,0.035 ccw(c0.005,0.038) 0.008,0.035 ; 0.008,0.035 0.008,0.035

## Text inside footprints (layer, text, board x,y; h text height)
J11: Top Overlay "1" at 17.475,0.825 h1.27; Mechanical 13 "10" at 31.021,5.335 h1.27; Mechanical 13 "1" at 17.526,2.895 h1.27
U5: Top Overlay "*" at 52.094,31.939 h0.5; Mechanical 13 "*" at 51.429,29.591 h1.27
U7: Top Overlay "*" at 71.196,33.106 h1.27; Mechanical 13 "*" at 71.285,32.659 h1.27
U8: Top Overlay "*" at 62.743,72.132 h1.27; Mechanical 13 "*" at 64.195,72.183 h1.27
X2: Top Overlay "*" at 39.9,40.529 h1.27 r180; Mechanical 13 "*" at 38.086,41.37 h1.27 r180